# Altium PCB dsg_card.PcbDoc
Units mil, origin at the board's own origin, x right, y up, seen from the top; angles counter-clockwise.
Board outline 6299.21 x 3937.01 mil, 4 copper layers (CMP/GND, Power Plane, Power Plane (Plane2), CMP/GND (Bottom)), stack 64.6 mil thick; 32 components, 79 nets, 333 pads, 12 vias.
Unrouted connection lines stored in the file: 87.
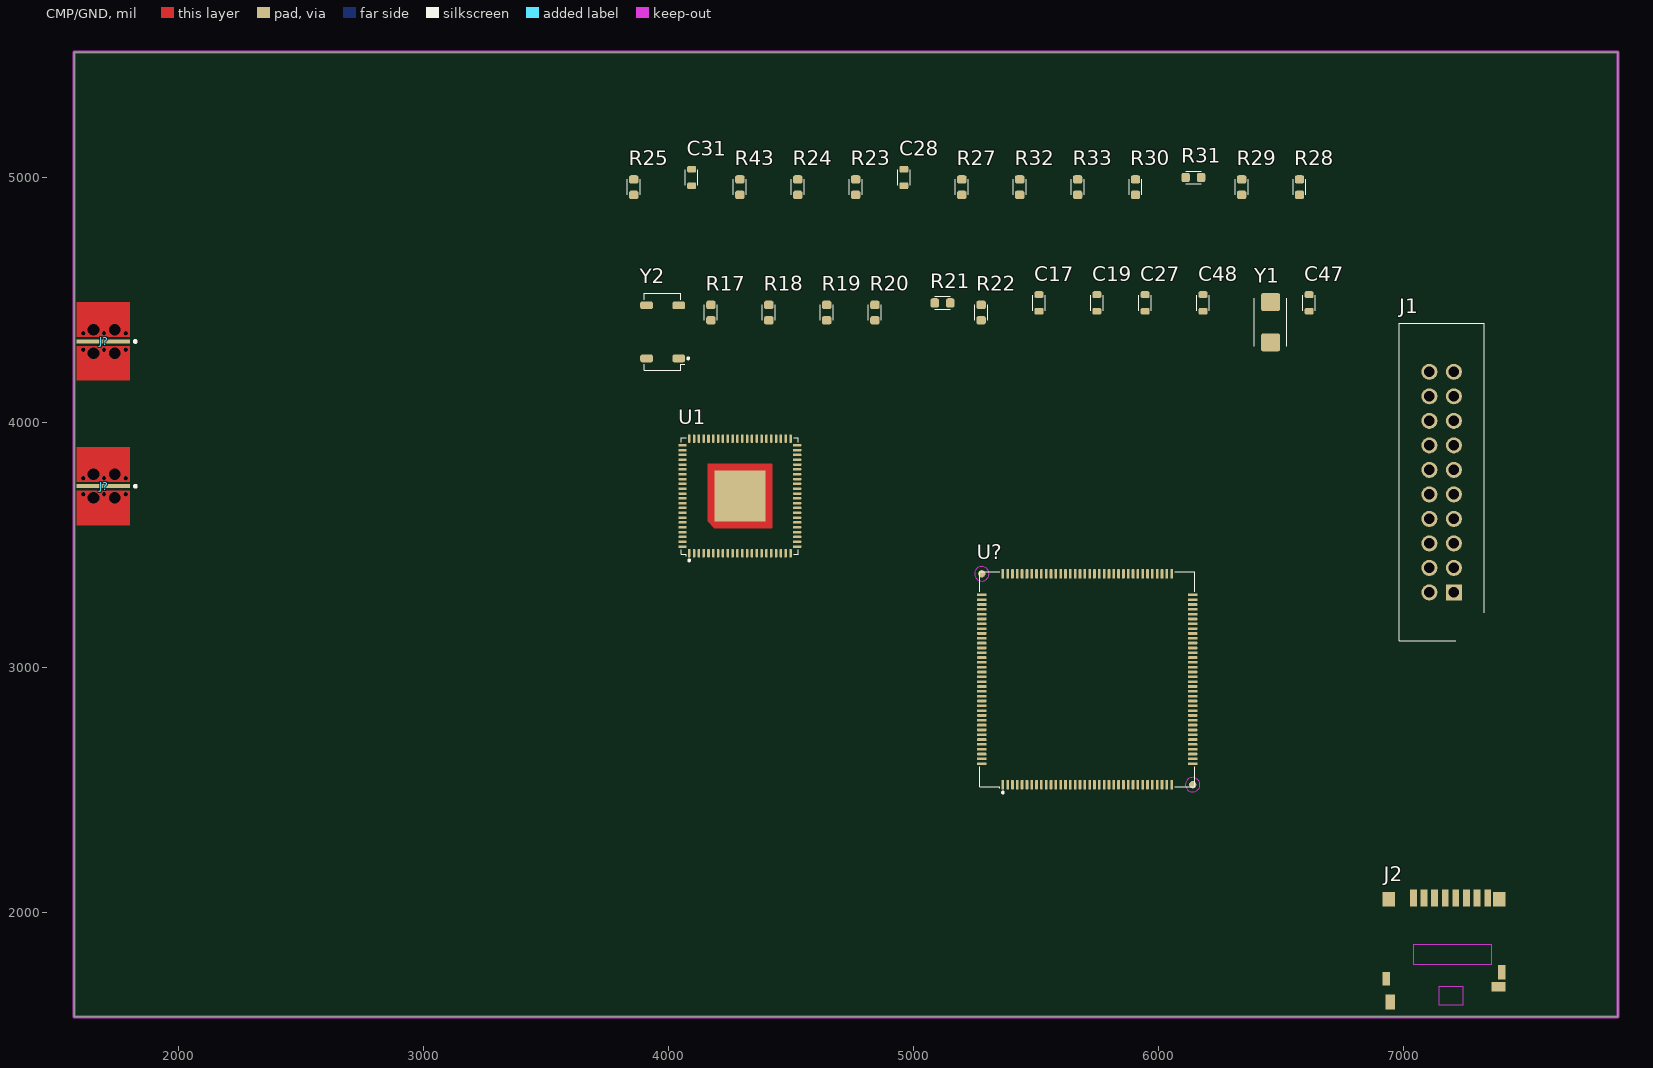
[diagram p0: CMP/GND view]
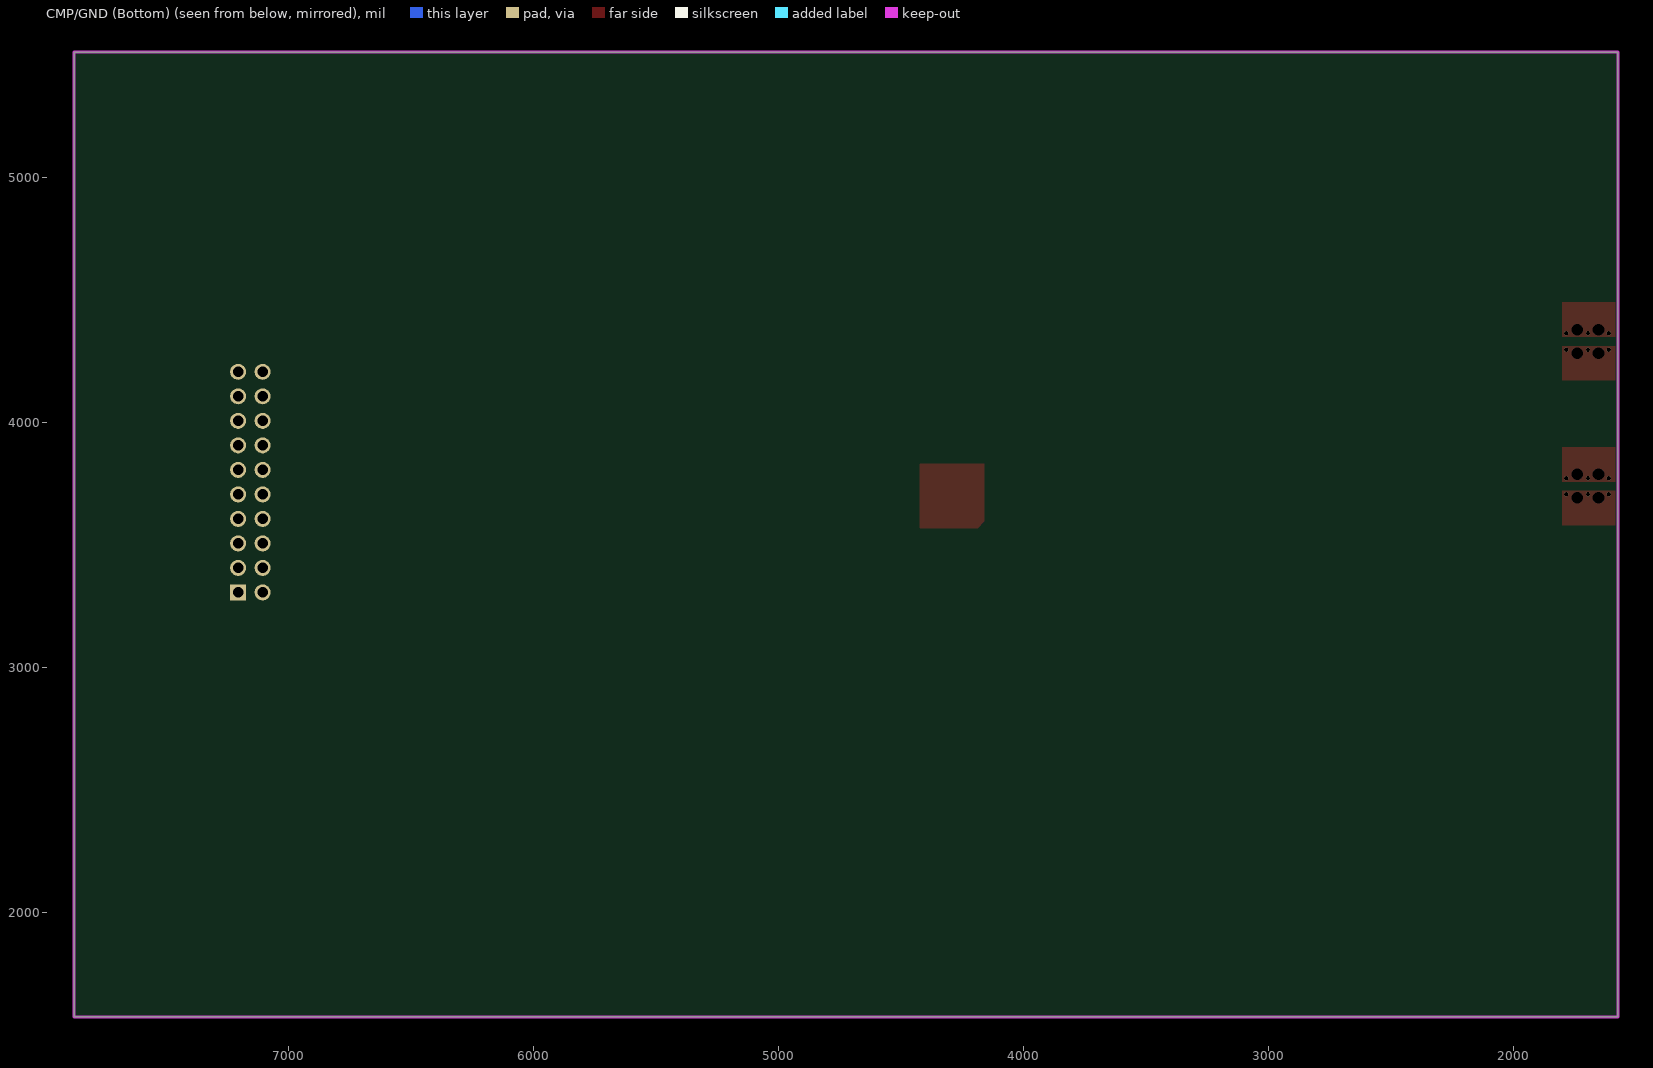
[diagram p1: CMP/GND (Bottom) view, seen from below]
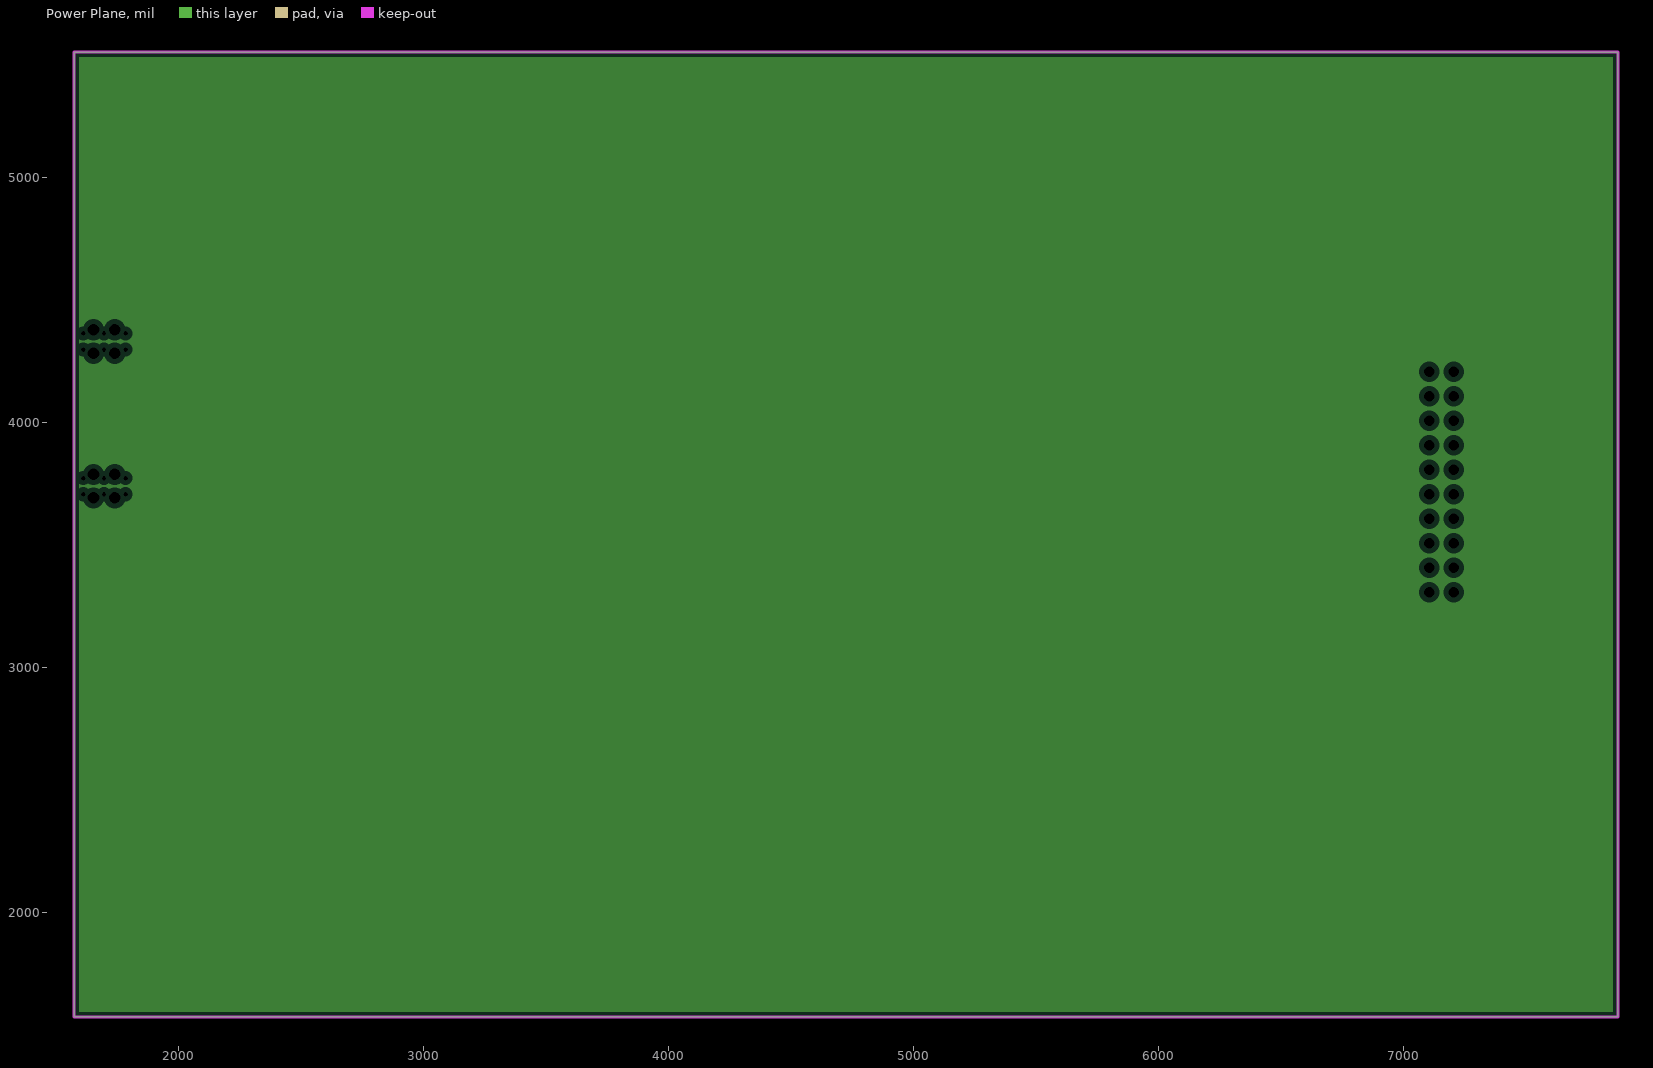
[diagram p2: Power Plane, clearances drawn from the general rule]
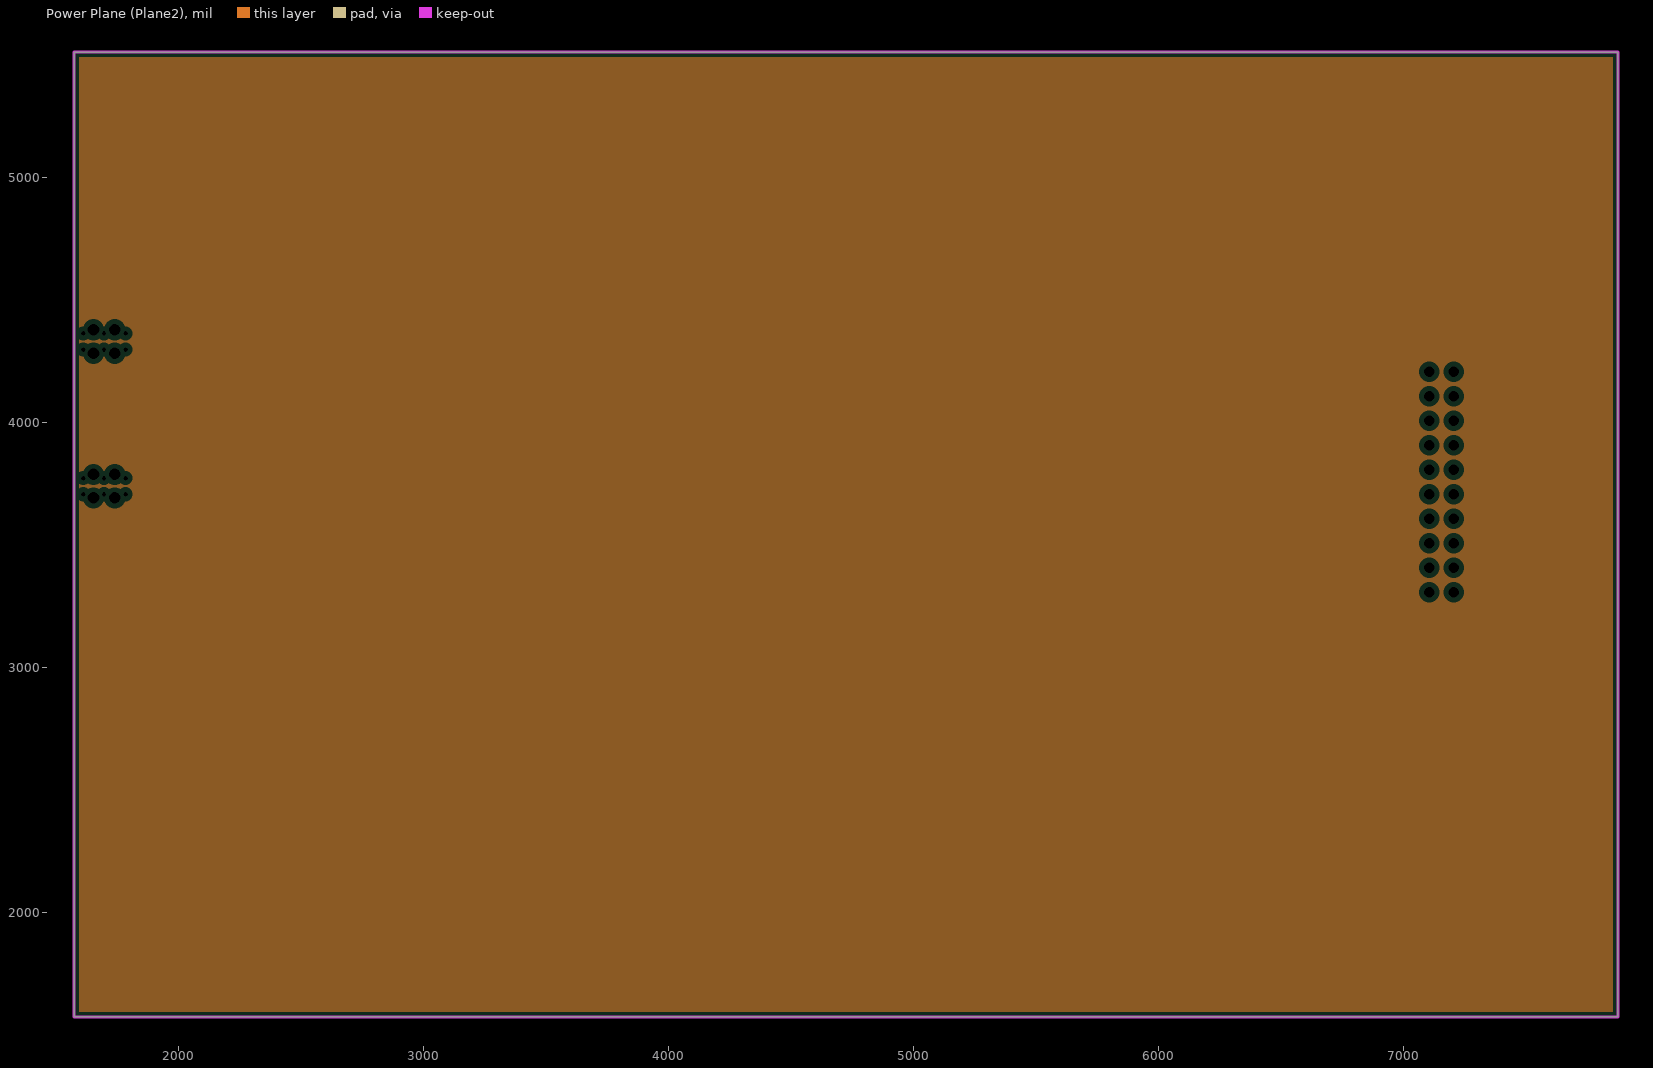
[diagram p3: Power Plane (Plane2), clearances drawn from the general rule]

## Layer stack, top to bottom
Top Solder: solder mask 1, Solder Resist, Dk 3.5
CMP/GND: signal copper 1.4
Dielectric 1: core 6.7, FR-408, Dk 3.66
Power Plane: plane copper 0.7
Dielectric 3: prepreg 47, FR-408, Dk 3.66
Power Plane (Plane2): plane copper 0.7
Dielectric 4: core 6.7, FR-408, Dk 3.66
CMP/GND (Bottom): signal copper 1.4
Bottom Solder: solder mask 1, Solder Resist, Dk 3.5

## Board outline
1574.8,1574.8 1574.8,5511.81 7874.02,5511.81 7874.02,1574.8 1574.8,1574.8

## Design rules (kind name [scope] priority, off if disabled: settings)
Clearance [All] p1: gap=10
PlaneClearance [All] p1: clearance=20
PlaneConnect [All] p1: planeconnectstyle=Relief reliefexpansion=20 reliefentries=4 reliefconductorwidth=10 reliefairgap=10
PolygonConnect [All] p1: connectstyle=Relief reliefconductorwidth=10 reliefentries=4 polygonreliefangle="90 Angle" airgapwidth=10
RoutingVias [All] p1: holewidth=28 width=50 viastyle="Through Hole" minholewidth=28 minwidth=50 maxholewidth=28 maxwidth=50
SolderMaskExpansion [All] p1: expansion=4
Width [All] p1: maxlimit=10 minlimit=10 preferedwidth=10
28 further rules are at their usual default settings.

## Components (designator, comment, footprint, x,y, rotation, side; value= is the part's Value field where it differs from the comment)
C17 "0.1µF" CAPC1608X85L22N 5511.82,4488.19 r90 top
C19 "10µF" CAPC1608X85L22N 5748.04,4488.19 r90 top
C27 "22pF" CAPC1608X85L22N 5944.89,4488.19 r90 top
C28 "22pF" CAPC1608X85L22N 4960.64,5000 r90 top
C31 "22pF" CAPC1608X85L22N 4094.49,5000 r90 top
C47 "22pF" CAPC1608X85L22N 6614.18,4488.19 r90 top
C48 "22pF" CAPC1608X85L22N 6181.11,4488.19 r90 top
J1 "2x10 JTAG" HDRVS20W25P100_10X2_1295X346H346 7204.72,3307.09 r90 top
J2 "DM3D-SF" DM3D-SF 7165.35,1850.39 r180 top
J? "SMA" EMERSON_EDGE_062 1692.91,3740.16 r90 top
J? "SMA" EMERSON_EDGE_062 1692.91,4330.71 r90 top
R17 "100k" RESC1608X45L30N 4173.23,4448.82 r90 top
R18 "100k" RESC1608X45L30N 4409.46,4448.82 r90 top
R19 "100k" RESC1608X45L30N 4645.68,4448.82 r90 top
R20 "100k" RESC1608X45L30N 4842.53,4448.82 r90 top
R21 "100k" RESC1608X45L30N 5118.12,4488.19 r0 top
R22 "100k" RESC1608X45L30N 5275.6,4448.82 r90 top
R23 "39" RESC1608X45L30N 4763.78,4960.63 r90 top
R24 "39" RESC1608X45L30N 4527.56,4960.63 r90 top
R25 "6.8k" RESC1608X45L30N 3858.27,4960.63 r90 top
R27 "10k" RESC1608X45L30N 5196.86,4960.63 r90 top
R28 "10k" RESC1608X45L30N 6574.81,4960.63 r90 top
R29 "10k" RESC1608X45L30N 6338.59,4960.63 r90 top
R30 "47k" RESC1608X45L30N 5905.52,4960.63 r90 top
R31 "47k" RESC1608X45L30N 6141.74,5000 r0 top
R32 "47k" RESC1608X45L30N 5433.08,4960.63 r90 top
R33 "47k" RESC1608X45L30N 5669.3,4960.63 r90 top
R43 "100" RESC1608X45L30N 4291.34,4960.63 r90 top
U1 "AD9914BCPZ" QFN50P1200X1200X90-89T670X670N 4291.34,3700.79 r0 top
U? "ATSAM3x8E_LQFP" QFP50P2200X2200X145-144L35N 5708.66,2952.76 r0 top
Y1 "12MHz" XTALSC320X500X120-2N 6456.7,4409.45 r90 top
Y2 "ABS25" OSCL550P795X375X250-4N 3976.38,4370.08 r90 top

## Footprints (in the part's own frame and the unit in brackets; to place one, negate y for a bottom-side part, rotate by r counter-clockwise, add the part's x,y. Pads: shape width x height; smd on the part's side, far side on the other; paste and mask are expansions set on the pad)
CAPC1608X85L22N [mm] "Capacitor, Chip; 1.60 mm L X 0.80 mm W X 0.85 mm H body"
  rrect51% 0.71x0.93 smd: 1(-0.86,0) 2(0.86,0)
  silkscreen extent -0.8,-0.64 0.8,0.64, body extent -0.8,-0.41 0.8,0.41, height 0.82
DM3D-SF [mm]
  rect 0.7x1.75 smd: 1(3.2,-5.35) 2(2.1,-5.35) 3(1,-5.35) 4(-0.1,-5.35) 5(-1.2,-5.35) 6(-2.3,-5.35) 7(-3.4,-5.35) 8(-4.5,-5.35)
  rect 1x1.55 smd: 9(5.6,5.45)
  rect 1.45x1 smd: 10(-5.625,3.875)
  rect 0.8x1.4 smd: 11(6,3.025)
  rect 0.8x1.5 smd: 12(-5.95,2.375)
  rect 1.3x1.5 smd: 13(5.75,-5.225) 14(-5.7,-5.225)
  CMP/GND keep-out region: -1.95,3.875 0.55,3.875 0.55,5.725 -1.95,5.725
  CMP/GND keep-out region: -4.9,-0.475 3.2,-0.475 3.2,1.525 -4.9,1.525
  body extent -5.98,-5.73 5.97,5.72, height 1.55
EMERSON_EDGE_062 [mil]
  rect 16x218 smd: 1(0.32,-1.22)
  round 0 hole 47: 2(-47.68,38.82) 3(48.32,38.82) 4(-47.68,-48.18) 5(48.32,-48.18)
  CMP/GND region: -17.68,107.81 -159.68,107.81 -159.68,-110.19 -17.68,-110.19
  CMP/GND region: 18.31,-110.24 160.31,-110.24 160.31,107.78 18.31,107.78
  silkscreen extent -5,-137 5,-127, body extent -123,-71 124,483, height 128
HDRVS20W25P100_10X2_1295X346H346 [mil] "Header, Vertical Shrouded, 100 mil pitch; 25 mil lead width, 20 pins, 2 rows, 10 pins per row, 1295 mil L X 346 mil W X 346 mil H body"
  rect 65.03x65.03 hole 43.36 paste-65.03: 1(0,0)
  round 65.03 hole 43.36 paste-65.03: 2(0,100) 3(100,0) 4(100,100) 5(200,0) 6(200,100) 7(300,0) 8(300,100) 9(400,0) 10(400,100) 11(500,0) 12(500,100) 13(600,0) 14(600,100) 15(700,0) 16(700,100) 17(800,0) 18(800,100) 19(900,0) 20(900,100)
  silkscreen extent -198,-123 1097,223, body extent -125,-140 1025,233, height 350
OSCL550P795X375X250-4N [mm] "Oscillator, L-Bend, 5.50 mm pitch; 4 pin, 7.95 mm L X 3.75 mm W X 2.50 mm H body"
  rrect50% 0.8x1.31 smd: 1(-2.75,-1.67) 2(2.75,-1.67) 3(2.75,1.67) 4(-2.75,1.67)
  silkscreen extent -4,-2.75 4,1.9, body extent -4,-2 4,2, height 2.65
QFN50P1200X1200X90-89T670X670N [mm] "Quad Flat No-Lead (QFN with Tab), 0.50 mm pitch; square, 22 pin X 22 pin, 12.00 mm L X 12.00 mm W X 0.90 mm H body"
  rrect54% 0.26x0.86 smd: 1(-5.25,-5.935) 2(-4.75,-5.935) 3(-4.25,-5.935) 4(-3.75,-5.935) 5(-3.25,-5.935) 6(-2.75,-5.935) 7(-2.25,-5.935) 8(-1.75,-5.935) 9(-1.25,-5.935) 10(-0.75,-5.935) 11(-0.25,-5.935) 12(0.25,-5.935) 13(0.75,-5.935) 14(1.25,-5.935) 15(1.75,-5.935) 16(2.25,-5.935) 17(2.75,-5.935) 18(3.25,-5.935) 19(3.75,-5.935) 20(4.25,-5.935) 21(4.75,-5.935) 22(5.25,-5.935) 45(5.25,5.935) 46(4.75,5.935) 47(4.25,5.935) 48(3.75,5.935) 49(3.25,5.935) 50(2.75,5.935) 51(2.25,5.935) 52(1.75,5.935) 53(1.25,5.935) 54(0.75,5.935) 55(0.25,5.935) 56(-0.25,5.935) 57(-0.75,5.935) 58(-1.25,5.935) 59(-1.75,5.935) 60(-2.25,5.935) 61(-2.75,5.935) 62(-3.25,5.935) 63(-3.75,5.935) 64(-4.25,5.935) 65(-4.75,5.935) 66(-5.25,5.935)
  rrect54% 0.86x0.26 smd: 23(5.935,-5.25) 24(5.935,-4.75) 25(5.935,-4.25) 26(5.935,-3.75) 27(5.935,-3.25) 28(5.935,-2.75) 29(5.935,-2.25) 30(5.935,-1.75) 31(5.935,-1.25) 32(5.935,-0.75) 33(5.935,-0.25) 34(5.935,0.25) 35(5.935,0.75) 36(5.935,1.25) 37(5.935,1.75) 38(5.935,2.25) 39(5.935,2.75) 40(5.935,3.25) 41(5.935,3.75) 42(5.935,4.25) 43(5.935,4.75) 44(5.935,5.25) 67(-5.935,5.25) 68(-5.935,4.75) 69(-5.935,4.25) 70(-5.935,3.75) 71(-5.935,3.25) 72(-5.935,2.75) 73(-5.935,2.25) 74(-5.935,1.75) 75(-5.935,1.25) 76(-5.935,0.75) 77(-5.935,0.25) 78(-5.935,-0.25) 79(-5.935,-0.75) 80(-5.935,-1.25) 81(-5.935,-1.75) 82(-5.935,-2.25) 83(-5.935,-2.75) 84(-5.935,-3.25) 85(-5.935,-3.75) 86(-5.935,-4.25) 87(-5.935,-4.75) 88(-5.935,-5.25)
  rect 5.3x5.3 smd paste-5.3 mask+0: 89(0,0)
  CMP/GND region: 3.35,0 3.35,-3.25 3.349,-3.266 3.345,-3.281 3.339,-3.295 3.331,-3.309 3.321,-3.321 3.309,-3.331 3.295,-3.339 3.281,-3.345 3.266,-3.349 -2.65,-3.35 -3.35,-2.65 -3.35,3.25 -3.349,3.266 -3.345,3.281 -3.339,3.295 -3.331,3.309 -3.321,3.321 -3.309,3.331 -3.295,3.339 -3.281,3.345 -3.266,3.349 3.25,3.35 3.266,3.349 3.281,3.345 3.295,3.339 3.309,3.331 3.321,3.321 3.331,3.309 3.339,3.295 3.345,3.281 3.349,3.266 3.35,3.25 3.35,0
  silkscreen extent -6.05,-6.78 6.05,6.05, body extent -6.05,-6.01 6.01,6.05, height 0.8
QFP50P2200X2200X145-144L35N [mm] "Quad Flat Pack (QFP), 0.50 mm pitch; square, 36 pin X 36 pin, 22.05 mm L X 22.05 mm W X 1.45 mm H body"
  rrect50% 0.28x0.98 smd: 1(-8.75,-10.925) 2(-8.25,-10.925) 3(-7.75,-10.925) 4(-7.25,-10.925) 5(-6.75,-10.925) 6(-6.25,-10.925) 7(-5.75,-10.925) 8(-5.25,-10.925) 9(-4.75,-10.925) 10(-4.25,-10.925) 11(-3.75,-10.925) 12(-3.25,-10.925) 13(-2.75,-10.925) 14(-2.25,-10.925) 15(-1.75,-10.925) 16(-1.25,-10.925) 17(-0.75,-10.925) 18(-0.25,-10.925) 19(0.25,-10.925) 20(0.75,-10.925) 21(1.25,-10.925) 22(1.75,-10.925) 23(2.25,-10.925) 24(2.75,-10.925) 25(3.25,-10.925) 26(3.75,-10.925) 27(4.25,-10.925) 28(4.75,-10.925) 29(5.25,-10.925) 30(5.75,-10.925) 31(6.25,-10.925) 32(6.75,-10.925) 33(7.25,-10.925) 34(7.75,-10.925) 35(8.25,-10.925) 36(8.75,-10.925) 73(8.75,10.925) 74(8.25,10.925) 75(7.75,10.925) 76(7.25,10.925) 77(6.75,10.925) 78(6.25,10.925) 79(5.75,10.925) 80(5.25,10.925) 81(4.75,10.925) 82(4.25,10.925) 83(3.75,10.925) 84(3.25,10.925) 85(2.75,10.925) 86(2.25,10.925) 87(1.75,10.925) 88(1.25,10.925) 89(0.75,10.925) 90(0.25,10.925) 91(-0.25,10.925) 92(-0.75,10.925) 93(-1.25,10.925) 94(-1.75,10.925) 95(-2.25,10.925) 96(-2.75,10.925) 97(-3.25,10.925) 98(-3.75,10.925) 99(-4.25,10.925) 100(-4.75,10.925) 101(-5.25,10.925) 102(-5.75,10.925) 103(-6.25,10.925) 104(-6.75,10.925) 105(-7.25,10.925) 106(-7.75,10.925) 107(-8.25,10.925) 108(-8.75,10.925)
  rrect50% 0.98x0.28 smd: 37(10.925,-8.75) 38(10.925,-8.25) 39(10.925,-7.75) 40(10.925,-7.25) 41(10.925,-6.75) 42(10.925,-6.25) 43(10.925,-5.75) 44(10.925,-5.25) 45(10.925,-4.75) 46(10.925,-4.25) 47(10.925,-3.75) 48(10.925,-3.25) 49(10.925,-2.75) 50(10.925,-2.25) 51(10.925,-1.75) 52(10.925,-1.25) 53(10.925,-0.75) 54(10.925,-0.25) 55(10.925,0.25) 56(10.925,0.75) 57(10.925,1.25) 58(10.925,1.75) 59(10.925,2.25) 60(10.925,2.75) 61(10.925,3.25) 62(10.925,3.75) 63(10.925,4.25) 64(10.925,4.75) 65(10.925,5.25) 66(10.925,5.75) 67(10.925,6.25) 68(10.925,6.75) 69(10.925,7.25) 70(10.925,7.75) 71(10.925,8.25) 72(10.925,8.75) 109(-10.925,8.75) 110(-10.925,8.25) 111(-10.925,7.75) 112(-10.925,7.25) 113(-10.925,6.75) 114(-10.925,6.25) 115(-10.925,5.75) 116(-10.925,5.25) 117(-10.925,4.75) 118(-10.925,4.25) 119(-10.925,3.75) 120(-10.925,3.25) 121(-10.925,2.75) 122(-10.925,2.25) 123(-10.925,1.75) 124(-10.925,1.25) 125(-10.925,0.75) 126(-10.925,0.25) 127(-10.925,-0.25) 128(-10.925,-0.75) 129(-10.925,-1.25) 130(-10.925,-1.75) 131(-10.925,-2.25) 132(-10.925,-2.75) 133(-10.925,-3.25) 134(-10.925,-3.75) 135(-10.925,-4.25) 136(-10.925,-4.75) 137(-10.925,-5.25) 138(-10.925,-5.75) 139(-10.925,-6.25) 140(-10.925,-6.75) 141(-10.925,-7.25) 142(-10.925,-7.75) 143(-10.925,-8.25) 144(-10.925,-8.75)
  round 0.75 smd paste-0.75 mask+0.375: FID1(10.93,-10.93) FID2(-10.93,10.93)
  CMP/GND keep-out circle w0.025: c10.93,-10.93 r0.75
  CMP/GND keep-out circle w0.025: c-10.93,10.93 r0.75
  silkscreen extent -11.13,-11.83 11.13,11.13, body extent -11.1,-11.1 11.1,11.1, height 1.8
RESC1608X45L30N [mm] "Resistor, Chip; 1.60 mm L X 0.85 mm W X 0.45 mm H body"
  rrect51% 0.87x0.98 smd: 1(-0.8,0) 2(0.8,0)
  silkscreen extent -0.8,-0.67 0.8,0.67, body extent -0.8,-0.4 0.8,0.4, height 0.45
XTALSC320X500X120-2N [mm] "Crystal, Side Lead; 2 pin, 3.20 mm L X 5.00 mm W X 1.20 mm H body"
  rrect27% 1.88x1.99 smd: 1(-2.095,0) 2(2.095,0)
  silkscreen extent -2.5,-1.68 2.5,1.68, body extent -2.58,-1.68 2.58,1.68, height 1.35

## Part data
C17: library part GRM188R71C104KA01D, "CAP CER 0.1UF 16V 10% X7R 0603"
C19: library part GRM188R60J106ME47J, "CAP CER 10UF 6.3V 20% X5R 0603"
C27 C28 C31 C47 C48: library part C1608C0G1H220J080AA, "CAP CER 22PF 50V C0G 0603"
J1: library part SBH11-PBPC-D10-ST-BK, "CONN HEADER 2.54MM 20POS GOLD"
J2: "CONN MICRO SD CARD PUSH-PULL"
J? J?: library part 142-0761-881, "CONN SMA JACK 50 OHM EDGE MNT"
R17 R18 R19 R20 R21 R22: library part ERJ-3EKF1003V, "RES SMD 100K OHM 1% 1/10W 0603"
R23 R24: library part RC0603JR-0739RL, "RES SMD 39 OHM 5% 1/10W 0603"
R25: library part ERJ-3EKF6801V, "RES SMD 6.8K OHM 1% 1/10W 0603"
R27 R28 R29: library part ERJ-3GEYJ103V, "RES 10K OHM 1/10W 5% 0603 SMD"
R30 R31 R32 R33: library part ERJ-3EKF4702V, "RES SMD 47K OHM 1% 1/10W 0603"
R43: library part ERJ-3EKF1000V, "RES SMD 100 OHM 1% 1/10W 0603"
U1: "IC DDS 3.5GSPS DAC 12BIT 88LFCSP"
U?: library part ATSAM3X8EA-AU, "IC MCU 32BIT 512KB FLASH 144LQFP"
Y1: library part 7A-12.000MAAJ-T, "CRYSTAL 12.0000MHZ 18PF SMD"
Y2: library part ABS25-32.768KHZ-T, "CRYSTAL 32.7680KHZ 12.5PF SMD"

## Via types
v1: diameter 18, hole 18, CMP/GND to CMP/GND (Bottom), 12 vias

## Nets (pads, with @x,y where several pads share a name; then routed paths per layer and width w, separated by ;. In a path a pad name is that pad's centre, name@x,y a point inside that pad or via, vN(x,y) a via of type N, cw(c..) or ccw(c..) an arc to the next point about the centre after c; other vN are vias at no path point)
5V_BP: U?.39
12V_EN: U?.22
12V_POK: U?.21
CLK_10M: U?.1
ERASE_ARD: U?.130
GND: C17.2 C19.2 C27.1 C28.1 C31.1 C47.1 C48.1 J1.4 J1.6 J1.8 J1.10 J1.12 J1.14 J1.16 J1.18 J1.20 J2.6 J2.9 J2.11 J2.12 J2.13 J2.14 R25.1 U?.12 U?.33 U?.44 U?.54 U?.58 U?.74 U?.106 U?.126
I2CSCL: U?.70
I2CSDA: U?.9
NetC27_2: C27.2 U?.49 Y2.4
NetC28_2: C28.2 U?.48 Y2.1
NetC31_2: C31.2 R25.2 U?.40
NetC47_2: C47.2 U?.35 Y1.2
NetC48_2: C48.2 U?.36 Y1.1
NetJ1_3: J1.3 R17.1
NetJ1_5: J1.5 R18.1 U?.29
NetJ1_7: J1.7 R19.1 U?.31
NetJ1_9: J1.9 J1.11 R20.1 U?.28
NetJ1_13: J1.13 U?.30
NetJ1_15: J1.15 R22.1 U?.69
NetJ2_1: J2.1 R33.1 U?.80
NetJ2_2: J2.2 R32.1 U?.79
NetJ2_3: J2.3 R29.1 U?.72
NetJ2_5: J2.5 R28.1 U?.71
NetJ2_7: J2.7 R31.1 U?.107
NetJ2_8: J2.8 R30.1 U?.81
NetJ2_10: J2.10 R27.1
NetJ?_1: J?.1@1694.13,3740.47
NetR21_1: R21.1 U?.53
NetR23_2: R23.2 U?.43
NetR24_2: R24.2 U?.42
NetR43_1: R43.1 U?.68
NetU?_13: U?.13
NetU?_14: U?.14
NetU?_15: U?.15
NetU?_16: U?.16
NetU?_17: U?.17
NetU?_18: U?.18
NetU?_19: U?.19
NetU?_55: U?.55
NetU?_59: U?.59
NetU?_60: U?.60
NetU?_63: U?.63
NetU?_64: U?.64
NetU?_65: U?.65
NetU?_66: U?.66
NetU?_67: U?.67
NetU?_93: U?.93
NetU?_94: U?.94
NetU?_95: U?.95
NetU?_96: U?.96
NetU?_97: U?.97
NetU?_98: U?.98
NetU?_99: U?.99
NetU?_100: U?.100
NetU?_101: U?.101
NetU?_102: U?.102
NetU?_116: U?.116
NetU?_117: U?.117
NetU?_131: U?.131
NetU?_132: U?.132
NetU?_133: U?.133
NetU?_134: U?.134
NetU?_135: U?.135
NetU?_136: U?.136
NetU?_137: U?.137
NetU?_138: U?.138
NetU?_139: U?.139
NetU?_141: U?.141
P_SD: U?.143
RST_ARD: U?.47
SYNC_STATE: U?.32 U?.144
USB_D+: R23.1 U?.37
USB_D-: R24.1 U?.38
USD_DET: U?.20
USR_BUTTN: U?.142
USR_LED1: U?.5
USR_LED3: U?.6
VCC3V3D: C17.1 C19.1 J1.1 J1.2 R17.2 R18.2 R19.2 R20.2 R21.2 R22.2 R27.2 R28.2 R29.2 R30.2 R31.2 R32.2 R33.2
VMCI: J2.4
pads on no net: J1.17 J1.19 J?.1@1694.13,4331.02 J?.2 J?.3 J?.4 J?.5 R43.2 U1.1 U1.2 U1.3 U1.4 U1.5 U1.6 U1.7 U1.8 U1.9 U1.10 U1.11 U1.12 U1.13 U1.14 U1.15 U1.16 U1.17 U1.18 U1.19 U1.20 U1.21 U1.22 U1.23 U1.24 U1.25 U1.26 U1.27 U1.28 U1.29 U1.30 U1.31 U1.32 U1.33 U1.34 U1.35 U1.36 U1.37 U1.38 U1.39 U1.40 U1.41 U1.42 U1.43 U1.44 U1.45 U1.46 U1.47 U1.48 U1.49 U1.50 U1.51 U1.52 U1.53 U1.54 U1.55 U1.56 U1.57 U1.58 U1.59 U1.60 U1.61 U1.62 U1.63 U1.64 U1.65 U1.66 U1.67 U1.68 U1.69 U1.70 U1.71 U1.72 U1.73 U1.74 U1.75 U1.76 U1.77 U1.78 U1.79 U1.80 U1.81 U1.82 U1.83 U1.84 U1.85 U1.86 U1.87 U1.88 U1.89 U?.2 U?.3 U?.4 U?.7 U?.8 U?.10 U?.11 U?.23 U?.24 U?.25 U?.26 U?.27 U?.34 U?.41 U?.45 U?.46 U?.50 U?.51 U?.52 U?.56 U?.57 U?.61 U?.62 U?.73 U?.75 U?.76 U?.77 U?.78 U?.82 U?.83 U?.84 U?.85 U?.86 U?.87 U?.88 U?.89 U?.90 U?.91 U?.92 U?.103 U?.104 U?.105 U?.108 U?.109 U?.110 U?.111 U?.112 U?.113 U?.114 U?.115 U?.118 U?.119 U?.120 U?.121 U?.122 U?.123 U?.124 U?.125 U?.127 U?.128 U?.129 U?.140 U?.FID1 U?.FID2 Y2.2 Y2.3
copper on no net:
  other v1: 1612.1,3707.47 1697.1,3707.47 1785.1,3707.47 1612.1,3773.47 1697.1,3773.47 1785.1,3773.47 1612.1,4298.02 1697.1,4298.02 1785.1,4298.02 1612.1,4364.02 1697.1,4364.02 1785.1,4364.02

## Polygon pours and split planes (outlines as drawn)
no net on Power Plane (split plane): 7853.92,1594.9 1594.9,1594.9 1594.9,5491.71 7853.92,5491.71
no net on Power Plane (Plane2) (split plane): 7853.92,1594.9 1594.9,1594.9 1594.9,5491.71 7853.92,5491.71

## Keep-outs
Keep-Out Layer:
  the board outline again, w12

## Text inside footprints (layer, text, board x,y; h text height)
J?: Mechanical 6 "16 mil reference trace for CPW line" at 1832.6,3760.47 h19.68 r90; Mechanical 6 "BOARD EDGE" at 1577.6,3385.47 h11.81 r90
J?: Mechanical 6 "16 mil reference trace for CPW line" at 1832.6,4351.02 h19.68 r90; Mechanical 6 "BOARD EDGE" at 1577.6,3976.02 h11.81 r90